# Altium PCB 10scm153adp1.PcbDoc
Units mil, origin at the board's own origin, x right, y up, seen from the top; angles counter-clockwise.
Board outline 6000 x 4000 mil, 2 copper layers (Top Layer, Bottom Layer); 36 components, 129 nets, 400 pads, 0 vias.
Unrouted connection lines stored in the file: 245.
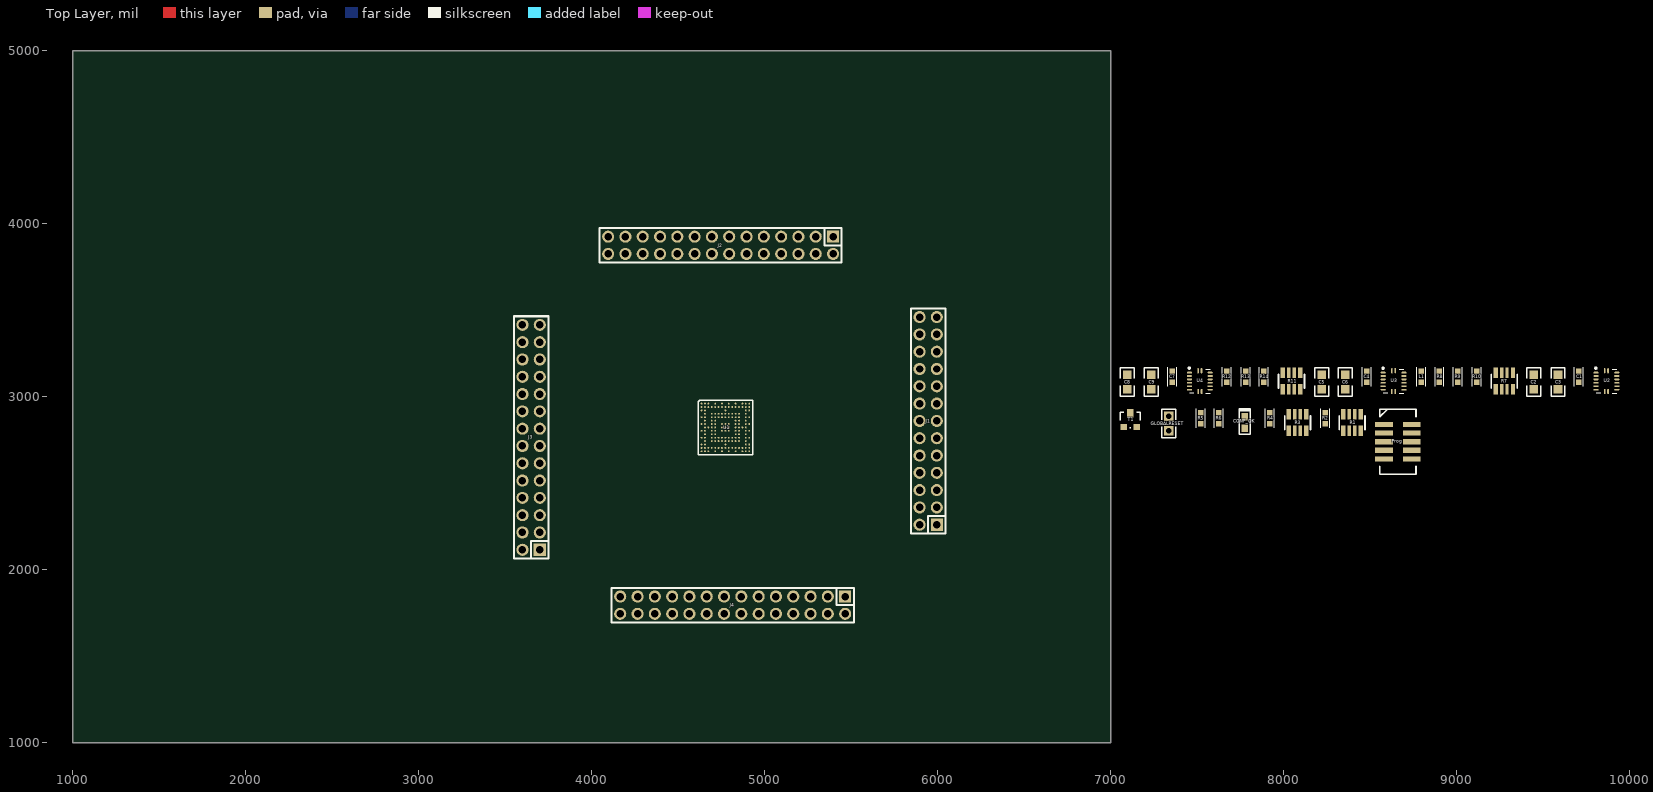
[diagram p0: Top Layer view]
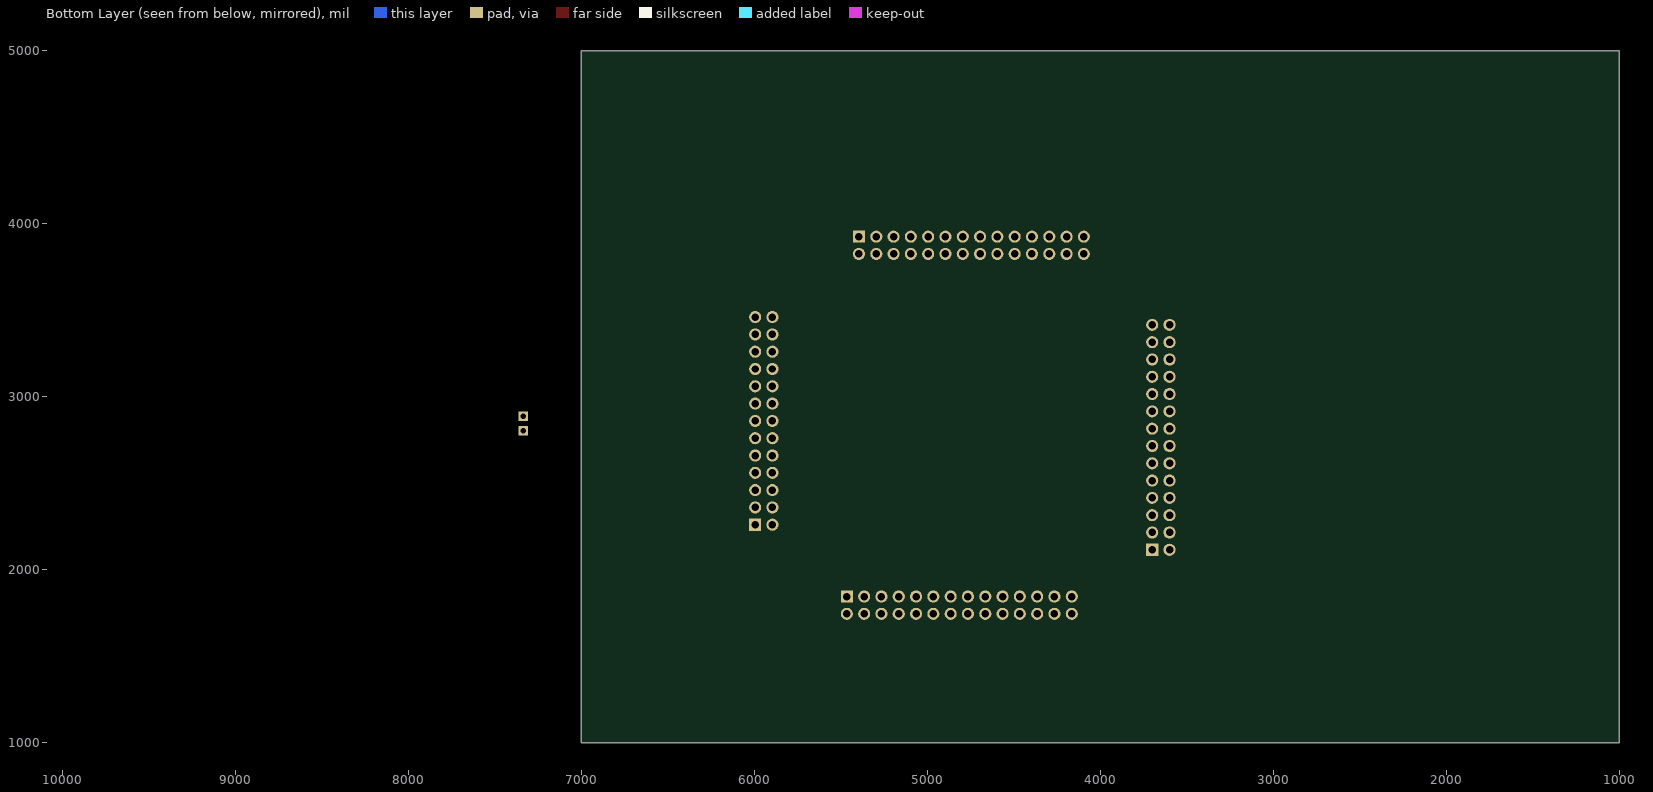
[diagram p1: Bottom Layer view, seen from below]

## Layer stack, top to bottom
Top Solder: solder mask 0.4, Solder Resist, Dk 3.5
Top Layer: signal copper 1.4
Dielectric 1: dielectric 12.6, FR-4, Dk 4.8
Bottom Layer: signal copper 1.4
Bottom Solder: solder mask 0.4, Solder Resist, Dk 3.5

## Board outline
1000,1000 7000,1000 7000,5000 1000,5000

## Design rules (kind name [scope] priority, off if disabled: settings)
Clearance BoardClearance [OnCopper vs IsKeepOut] p1: gap=19.68 ignorepadtopadclearanceinfootprint=FALSE except(0: Arc-Hole Track-Hole SMDPad-Hole THPad-Hole Via-Hole Fill-Hole Poly-Hole Region-Hole Text-Hole)
Clearance InPolyClearance [InPoly] p2: gap=11.81 ignorepadtopadclearanceinfootprint=FALSE except(0: Arc-Hole Track-Hole SMDPad-Hole THPad-Hole Via-Hole Fill-Hole Poly-Hole Region-Hole Text-Hole)
Clearance ClearanceMidLayer [OnMid] p3: gap=5 ignorepadtopadclearanceinfootprint=FALSE except(0: Arc-Hole Track-Hole SMDPad-Hole THPad-Hole Via-Hole Fill-Hole Poly-Hole Region-Hole Text-Hole)
Clearance ClearanceOuterLayer [OnBottomLayer or OnTopLayer] p4: gap=5 ignorepadtopadclearanceinfootprint=FALSE except(0: Arc-Hole Track-Hole SMDPad-Hole THPad-Hole Via-Hole Fill-Hole Poly-Hole Region-Hole Text-Hole)
ComponentClearance [All] p1 off: gap=10 collisioncheckmode=3 verticalgap=10 showdistances=FALSE
DiffPairsRouting [All] p1: maxlimit=10 minlimit=10 mostfreqgap=10 toplayer_minwidth=15 toplayer_maxwidth=15 toplayer_prefwidth=15 bottomlayer_minwidth=15 bottomlayer_maxwidth=15 bottomlayer_prefwidth=15 maxuncoupledlength=500
Height [All] p1: minheight=0 maxheight=1574.8 prefheight=500
HoleSize [All] p1: absolutevalues=TRUE maxlimit=236.22 minlimit=1 maxpercent=80.000 minpercent=20.000
MinimumAnnularRing MinimumAnnularRingOuterLayer [OnTopLayer or OnBottomLayer] p1: minimumring=6
MinimumAnnularRing MinimumAnnularRingOnMid [OnMid] p2: minimumring=5
MinimumSolderMaskSliver [not(IsComponentPrimitive and OnSolderMask)] p1 off: minsoldermaskwidth=3.94
MinimumSolderMaskSliver SilkscreenOverComponentPads [All] p2 off: minsoldermaskwidth=10
PolygonConnect PolygonConnectDirect [IsVia] p1: connectstyle=Direct reliefconductorwidth=10 reliefentries=4 polygonreliefangle="90 Angle" airgapwidth=10
PolygonConnect PolygonConnectElse [All] p2: connectstyle=Relief reliefconductorwidth=9.84 reliefentries=4 polygonreliefangle="90 Angle" airgapwidth=10
RoutingVias [All] p1: holewidth=23.62 width=43.31 viastyle="Through Hole" minholewidth=11.81 minwidth=19.68 maxholewidth=78.74 maxwidth=157.48
SilkToSilkClearance [All] p1 off: silktosilkclearance=3.94
SolderMaskExpansion [All] p1: expansion=4 istentingtop=FALSE
Width [All] p1: maxlimit=157.48 minlimit=4 preferedwidth=7.09 minimp=50.000000 maximp=50.000000 favimp=50.000000 checkconnectedcopper=TRUE
24 further rules are at their usual default settings.

## Classes and differential pairs
component class PWR: C1 C2 C3 C4 C5 C6 C7 C8 C9 L1 R7 R8 R9 R10 R11 R12 R13 R14 U2 U3 U4
component class IO: CONF_OK GLOBALRESET Prog R1 R2 R3 R4 R5 R6 T1 U1
component class 10scm153adp1_main: J1 J2 J3 J4
differential pair R13P14: +R13P14_P -R13P14_N
differential pair R9P9: +R9P9_P -R9P9_N
differential pair R5P4: +R5P4_P -R5P4_N
differential pair R3P3: +R3P3_P -R3P3_N
differential pair P15R14: +P15R14_P -P15R14_N
differential pair P8R7: +P8R7_P -P8R7_N
differential pair P7P6: +P7P6_P -P7P6_N
differential pair P2N1: +P2N1_P -P2N1_N
differential pair N15N14: +N15N14_P -N15N14_N
differential pair N8M8: +N8M8_P -N8M8_N
differential pair M12L11: +M12L11_P -M12L11_N
differential pair M11L10: +M11L10_P -M11L10_N
differential pair M9L9: +M9L9_P -M9L9_N
differential pair M7L8: +M7L8_P -M7L8_N
differential pair M5M4: +M5M4_P -M5M4_N
differential pair L7L6: +L7L6_P -L7L6_N
differential pair L4L5: +L4L5_P -L4L5_N
differential pair K14J14: +K14J14_P -K14J14_N
differential pair K11K12: +K11K12_P -K11K12_N
differential pair K4K5: +K4K5_P -K4K5_N
differential pair K2L1: +K2L1_P -K2L1_N
differential pair J15G15: +J15G15_P -J15G15_N
differential pair J12H11: +J12H11_P -J12H11_N
differential pair J9J11: +J9J11_P -J9J11_N
differential pair J5J4: +J5J4_P -J5J4_N
differential pair J2H3: +J2H3_P -J2H3_N
differential pair H12H13: +H12H13_P -H12H13_N
differential pair G11G12: +G11G12_P -G11G12_N
differential pair G5F5: +G5F5_P -G5F5_N
differential pair F11F12: +F11F12_P -F11F12_N
differential pair E11D12: +E11D12_P -E11D12_N
differential pair E9E10: +E9E10_P -E9E10_N
differential pair E2E1: +E2E1_P -E2E1_N
differential pair D11D10: +D11D10_P -D11D10_N
differential pair D7E7: +D7E7_P -D7E7_N
differential pair C15C14: +C15C14_P -C15C14_N
differential pair C2D2: +C2D2_P -C2D2_N
differential pair B15B14: +B15B14_P -B15B14_N
differential pair B13A14: +B13A14_P -B13A14_N
differential pair B12B11: +B12B11_P -B12B11_N
differential pair B7B6: +B7B6_P -B7B6_N
differential pair B1C1: +B1C1_P -B1C1_N
differential pair A9A11: +A9A11_P -A9A11_N
differential pair A7A5: +A7A5_P -A7A5_N
differential pair A2A3: +A2A3_P -A2A3_N

## Components (designator, comment, footprint, x,y, rotation, side; value= is the part's Value field where it differs from the comment)
C1 "4u7/10" 0603-IPC 9705,3115 r90 top
C2 "22u/25" 0805 9445,3085 r90 top
C3 "22u/25" 0805 9585,3085 r90 top
C4 "4u7/10" 0603-IPC 8480,3115 r90 top
C5 "22u/25" 0805 8220,3085 r90 top
C6 "22u/25" 0805 8355,3085 r90 top
C7 "4u7/10" 0603-IPC 7355,3115 r90 top
C8 "22u/25" 0805 7095,3085 r90 top
C9 "22u/25" 0805 7235,3085 r90 top
CONF_OK "LED0603-RW120" D0603 7775,2850 r90 top
GLOBALRESET "SHORT0805" SHORT0805 7335,2845 r90 top
J1 "ZL307-2X13" ZL307-2X13 5995,2260 r90 top
J2 "ZL307-2X14" ZL307-2X14 5395,3925 r180 top
J3 "ZL307-2X14" ZL307-2X14 3700,2115 r90 top
J4 "ZL307-2X14" ZL307-2X14 5465,1845 r180 top
L1 "BLM18AG102SN1D" 0603-IPC 8795,3115 r90 top
Prog "Minitek127_5D" MINITEK127_5D 8660,2740 r90 top
R1 "4x10k" 1206RP 8395,2850 r0 top
R2 "1k" 0603R 8240,2875 r90 top
R3 "4x10k" 1206RP 8080,2850 r0 top
R4 "4k7" 0603R 7920,2875 r90 top
R5 "4k7" 0603R 7520,2875 r90 top
R6 "330R" 0603R 7625,2875 r90 top
R7 "4x47k" 1206RP 9275,3090 r0 top
R8 "0R" 0603R 8900,3115 r90 top
R9 "0R" 0603R 9005,3115 r90 top
R10 "0R" 0603R 9115,3115 r90 top
R11 "4x47k" 1206RP 8045,3090 r0 top
R12 "0R" 0603R 7670,3115 r90 top
R13 "0R" 0603R 7780,3115 r90 top
R14 "0R" 0603R 7885,3115 r90 top
T1 "BC847" SOT23-3 7075,2825 r0 top
U1 "10M08SCM153I7G" MBGA153x15 4635,2960 r0 top
U2 "EP5388QI" EP5368QI 9865,3090 r0 top
U3 "EP5388QI" EP5368QI 8635,3090 r0 top
U4 "EP5388QI" EP5368QI 7515,3090 r0 top

## Footprints (in the part's own frame and the unit in brackets; to place one, negate y for a bottom-side part, rotate by r counter-clockwise, add the part's x,y. Pads: shape width x height; smd on the part's side, far side on the other; paste and mask are expansions set on the pad)
0603-IPC [mm]
  rect 0.8x0.8 smd: 1(-0.8,0) 2(0.8,0)
  silkscreen extent -1.4,-0.65 1.4,0.65, body extent -0.8,-0.4 0.8,0.4, height 1
0603R [mm]
  rect 0.8x0.8 smd: 1(-0.8,0) 2(0.8,0)
  silkscreen extent -1.4,-0.65 1.4,0.65, body extent -0.8,-0.4 0.8,0.4, height 0.45
0805 [mil]
  rect 50x50 smd: 1(-42.5,0) 2(42.5,0)
  silkscreen extent -84,-40 84,40, body extent -39,-28 39,28, height 51
1206RP [mil]
  rect 25.59x60 smd: 1(-50.2,-48) 4(50.2,-48) 5(50.2,48) 8(-50.2,48)
  rect 19.68x60 smd: 2(-15.75,-48) 3(15.75,-48) 6(15.75,48) 7(-15.75,48)
  silkscreen extent -75,-39 75,39, body extent -63,-31 63,31, height 22
D0603 [mm]
  rect 1.1x1 smd: ANOD(-0.85,0) CATH(0.85,0)
  silkscreen extent -1.7,-0.8 2.05,0.8, body extent -1.06,-0.7 0.94,0.7, height 1.35
EP5368QI [mm]
  oval 0.75x0.25 smd paste+0 mask+0.1: 1(-1.525,1.25) 2(-1.525,0.75) 3(-1.525,0.25) 4(-1.525,-0.25) 5(-1.525,-0.75) 6(-1.525,-1.25) 9(1.525,-1.25) 10(1.525,-0.75) 11(1.525,-0.25) 12(1.525,0.25) 13(1.525,0.75) 14(1.525,1.25)
  oval 0.25x0.75 smd mask+0.1: 7(-0.25,-1.525) 8(0.25,-1.525) 15(0.25,1.525) 16(-0.25,1.525)
  silkscreen extent -1.68,-1.75 1.5,2.03, body extent -1.51,-1.51 1.51,1.51, height 1.2
MBGA153x15 [mm]
  round 0.26 smd mask+0.015: A1(0,0) A2(0.5,0) A3(1,0) A5(2,0) A7(3,0) A9(4,0) A11(5,0) A13(6,0) A14(6.5,0) A15(7,0) B1(0,-0.5) B2(0.5,-0.5) B3(1,-0.5) B4(1.5,-0.5) B5(2,-0.5) B6(2.5,-0.5) B7(3,-0.5) B8(3.5,-0.5) B9(4,-0.5) B10(4.5,-0.5) B11(5,-0.5) B12(5.5,-0.5) B13(6,-0.5) B14(6.5,-0.5) B15(7,-0.5) C1(0,-1) C2(0.5,-1) C8(3.5,-1) C14(6.5,-1) C15(7,-1) D2(0.5,-1.5) D4(1.5,-1.5) D5(2,-1.5) D6(2.5,-1.5) D7(3,-1.5) D8(3.5,-1.5) D9(4,-1.5) D10(4.5,-1.5) D11(5,-1.5) D12(5.5,-1.5) D14(6.5,-1.5) E1(0,-2) E2(0.5,-2) E4(1.5,-2) E5(2,-2) E6(2.5,-2) E7(3,-2) E8(3.5,-2) E9(4,-2) E10(4.5,-2) E11(5,-2) E12(5.5,-2) E14(6.5,-2) E15(7,-2) F2(0.5,-2.5) F4(1.5,-2.5) F5(2,-2.5) F11(5,-2.5) F12(5.5,-2.5) F14(6.5,-2.5) G1(0,-3) G2(0.5,-3) G4(1.5,-3) G5(2,-3) G7(3,-3) G8(3.5,-3) G9(4,-3) G11(5,-3) G12(5.5,-3) G14(6.5,-3) G15(7,-3) H2(0.5,-3.5) H3(1,-3.5) H4(1.5,-3.5) H5(2,-3.5) H7(3,-3.5) H8(3.5,-3.5) H9(4,-3.5) H11(5,-3.5) H12(5.5,-3.5) H13(6,-3.5) H14(6.5,-3.5) J1(0,-4) J2(0.5,-4) J4(1.5,-4) J5(2,-4) J7(3,-4) J8(3.5,-4) J9(4,-4) J11(5,-4) J12(5.5,-4) J14(6.5,-4) J15(7,-4) K2(0.5,-4.5) K4(1.5,-4.5) K5(2,-4.5) K11(5,-4.5) K12(5.5,-4.5) K14(6.5,-4.5) L1(0,-5) L2(0.5,-5) L4(1.5,-5) L5(2,-5) L6(2.5,-5) L7(3,-5) L8(3.5,-5) L9(4,-5) L10(4.5,-5) L11(5,-5) L12(5.5,-5) L14(6.5,-5) L15(7,-5) M2(0.5,-5.5) M4(1.5,-5.5) M5(2,-5.5) M6(2.5,-5.5) M7(3,-5.5) M8(3.5,-5.5) M9(4,-5.5) M10(4.5,-5.5) M11(5,-5.5) M12(5.5,-5.5) M14(6.5,-5.5) N1(0,-6) N2(0.5,-6) N8(3.5,-6) N14(6.5,-6) N15(7,-6) P1(0,-6.5) P2(0.5,-6.5) P3(1,-6.5) P4(1.5,-6.5) P5(2,-6.5) P6(2.5,-6.5) P7(3,-6.5) P8(3.5,-6.5) P9(4,-6.5) P10(4.5,-6.5) P11(5,-6.5) P12(5.5,-6.5) P13(6,-6.5) P14(6.5,-6.5) P15(7,-6.5) R1(0,-7) R2(0.5,-7) R3(1,-7) R5(2,-7) R7(3,-7) R9(4,-7) R11(5,-7) R13(6,-7) R14(6.5,-7) R15(7,-7)
  silkscreen extent -0.5,-7.5 7.5,0.5, body extent -0.5,-7.5 7.5,0.5, height 1
MINITEK127_5D [mm]
  rect 0.76x2.6 smd paste+0 mask+0.05: 1(2.54,2.05) 2(2.54,-2.05) 3(1.27,2.05) 4(1.27,-2.05) 5(0,2.05) 6(0,-2.05) 7(-1.27,2.05) 8(-1.27,-2.05) 9(-2.54,2.05) 10(-2.54,-2.05)
  silkscreen extent -4.76,-2.65 4.76,2.65, body extent -4.76,-2.75 4.76,2.75, height 5.6
SHORT0805 [mm]
  rect 1.4x1.4 hole 0.8: 1(-1.079,0) 2(1.079,0)
  silkscreen extent -2.12,-1.02 2.12,1.02, body extent -1.5,-0.4 1.5,0.4, height 0.9
SOT23-3 [mil]
  rect 36x36 smd: 1(0,0) 2(75,0)
  rect 36x50 smd: 3(38,80)
  silkscreen extent -20,-5 95,85, body extent -22,-7 97,87, height 43
ZL307-2X13 [mil]
  rect 70x70 hole 43.31: 1(0,0)
  round 70 hole 43.31: 2(0,100) 3(100,0) 4(100,100) 5(200,0) 6(200,100) 7(300,0) 8(300,100) 9(400,0) 10(400,100) 11(500,0) 12(500,100) 13(600,0) 14(600,100) 15(700,0) 16(700,100) 17(800,0) 18(800,100) 19(900,0) 20(900,100) 21(1000,0) 22(1000,100) 23(1100,0) 24(1100,100) 25(1200,0) 26(1200,100)
  silkscreen extent -50,-50 1250,150, body extent -50,-50 1250,150, height 276
ZL307-2X14 [mil]
  rect 70x70 hole 43.31: 1(0,0)
  round 70 hole 43.31: 2(0,100) 3(100,0) 4(100,100) 5(200,0) 6(200,100) 7(300,0) 8(300,100) 9(400,0) 10(400,100) 11(500,0) 12(500,100) 13(600,0) 14(600,100) 15(700,0) 16(700,100) 17(800,0) 18(800,100) 19(900,0) 20(900,100) 21(1000,0) 22(1000,100) 23(1100,0) 24(1100,100) 25(1200,0) 26(1200,100) 27(1300,0) 28(1300,100)
  silkscreen extent -50,-50 1350,150, body extent -50,-50 1350,150, height 276

## Part data
C1 C4 C7: library part CAP131, Manufacturer5=Samsung, DateOfPrice5=01-01-2010, Descript="Kondensator: ceramiczny; MLCC; 4,7uF; 10V; X5R; ±10%; SMD; 0603", ID=131, Kod=CAP131, Price5=0, Reference5=CL10A475KP8NNNC, Supplier5=tme.pl, Typ5=CL10A475KP8NNNC
C2 C3 C5 C6 C8 C9: library part CAP96, Manufacturer5=Samsung, DateOfPrice5=29-12-2020, Descript="Kondensator: ceramiczny; MLCC; 22uF; 25V; X5R; ±20%; SMD; 0805", ID=96, Kod=CAP96, Price5=1,5, Reference5=CL21A226MAQNNNE, Supplier5=tme.pl, Typ5=CL21A226MAQNNNE
CONF_OK: library part Opt25, Manufacturer5=Honglitronic, DateOfPrice5=10-05-2020, Descript="Dioda LED, SMD 0603, Czerwona 626-636nm, 50-70 mCd /10mA, water clear, 120°", ID=25, Kod=Opt25, Price5=0,12, Reference5=LED0603-RW120, Supplier5=maritex.com.pl, Typ5=LED0603-RW120
GLOBALRESET: library part Res238, Manufacturer5=-, Descript="Przewlekana zwora z drutu na planie rezystora 0805", ID=238, Kod=Res238, Price5=0,1, Reference5=-, Supplier5=-, Typ5=-
J1: library part CON85, Manufacturer5=Connfly, DateOfPrice5=05-01-2021, Descript="Gniazdo; kołkowe; żeńskie; PIN: 80; toczone styki; proste; 2,54mm, wycięte 2x13 pinów", ID=85, Kod=CON85, Price5=12, Reference5=ZL307-2X40, Replacement=bd, Supplier5=tme, Typ5=DS1002-03-2*40131
J2 J3 J4: library part CON84, Manufacturer5=Connfly, DateOfPrice5=05-01-2021, Descript="Gniazdo; kołkowe; żeńskie; PIN: 80; toczone styki; proste; 2,54mm, wycięte 2x14 pinów", ID=84, Kod=CON84, Price5=20, Reference5=ZL307-2X40, Replacement=bd, Supplier5=tme, Typ5=DS1002-03-2*40131
L1: library part Ind41, InductCurr=-, Manufacturer5=Murata, DateOfPrice5=10-05-2020, Descript="Ferryt: koralik; Imp.@ 100MHz:1000om; Montaż: SMD; 0,4A; Obud:0603", ID=41, Kod=Ind41, Price5=0, Reference5=BLM18AG102SN1D, Supplier5=tme.pl, Typ5=BLM18AG102SN1D
Prog: library part CON83, Manufacturer5=Amphenol, DateOfPrice5=29-12-2020, Descript="Gniazdo; IDC; Minitek127; męskie; PIN: 10; pionowe; 1,27mm; SMT; 2x5", ID=83, Kod=CON83, Price5=3,5, Reference5=20021221-00010C4LF, Replacement=bd, Supplier5=tme, Typ5=20021221-00010C4LF
R1 R3: library part Res287, Manufacturer5="Royal Ohm", DateOfPrice5=29-12-2020, Descript="Drabinka rezystorowa: Y; 10kΩ; SMD; 1206; Il.rezystorów: 4; 63mW", ID=287, Kod=Res287, Price5=0,1, Reference5=DR1206-10K-4/8, Supplier5=tme, Typ5=4D03WGJ0103T5E
R2: library part Res52, Manufacturer5="Royal Ohm", DateOfPrice5=10-05-2020, Descript="Rezystor: thick film; SMD; 0603; 1kom; 0,1W; ±1%; -55÷155°C", ID=52, Kod=Res52, Price5=0,08, Reference5=SMD0603-1K-1%, Supplier5=tme.pl, Typ5=0603SAF1001T5E
R4 R5: library part Res171, Manufacturer5="Royal Ohm", DateOfPrice5=25-06-2020, Descript="Rezystor: thick film; SMD; 0603; 4,7kom; 0,1W; ±1%; -55÷125°C", ID=171, Kod=Res171, Price5=0,1, Reference5=SMD0603-4K7-1%, Supplier5=tme.pl, Typ5=0603SAF4701T5E
R6: library part Res127, Manufacturer5="Royal Ohm", DateOfPrice5=25-06-2020, Descript="Rezystor: thick film; SMD; 0603; 330Ω; 0,1W; ±1%; -55÷125°C", ID=127, Kod=Res127, Price5=0,1, Reference5=SMD0603-330R-1%, Supplier5=tme.pl, Typ5=0603SAF3300T5E
R7 R11: library part Res182, Manufacturer5="Royal Ohm", DateOfPrice5=10-05-2020, Descript="Drabinka rezystorowa: Y; 47kΩ; SMD; 1206; Il.rezystorów:4; 63mW", ID=182, Kod=Res182, Price5=0,1, Reference5=DR1206-47K-4/8, Supplier5=tme.pl, Typ5=4D03WGJ0473T
R8 R9 R10 R12 R13 R14: library part Res1, Manufacturer5=Yageo, DateOfPrice5=25-06-2020, Descript="Rezystor: thick film; SMD; 0603; 0ohm; 0,1W; ±5%; -55÷155°C", ID=1, Kod=Res1, Price5=0,1, Reference5=RC0603JR-070R, Supplier5=tme.pl, Typ5=RC0603JR-070RL
T1: library part Tra11, Manufacturer5=NXP, DateOfPrice5=01-01-2010, Descript="SMD transistor 50V 0.1A", ID=11, Kod=Tra11, Price5=0, Reference5=BC847A.215, Supplier5=tme.pl, Typ5=BC847A.215
U1: library part ICs341, Manufacturer5=Intel, DateOfPrice5=29-12-2020, Descript="FPGA - Field Programmable Gate Array non-volatile FPGA, 112 I/O, 153MBGA", ID=341, Kod=ICs341, Price5=100, Reference5=989-10M08SCM153I7G, Supplier5=Mouser, Typ5=10M08SCM153I7G
U2 U3 U4: library part ICs340, Manufacturer5=Intel, DateOfPrice5=29-12-2020, Descript="Switching Voltage Regulators 800mA BUCK REGULATOR INTEGRATED INDUCTOR", ID=340, Kod=ICs340, Price5=15, Reference5=884-EP5388QI, Supplier5=Mouser, Typ5=EP5388QI

## Nets (pads, with @x,y where several pads share a name; then routed paths per layer and width w, separated by ;. In a path a pad name is that pad's centre, name@x,y a point inside that pad or via, vN(x,y) a via of type N, cw(c..) or ccw(c..) an arc to the next point about the centre after c; other vN are vias at no path point)
+5V: C1.1 C4.1 C7.1 J1.25 R7.1 R7.2 R7.3 R7.4 R11.1 R11.2 R11.3 R11.4 U2.13 U2.14 U3.13 U3.14 U4.13 U4.14
/CONFIG: R3.3 R3.4 U1.E8
/DEV_CLR: GLOBALRESET.1 R5.1 U1.B8
/STATUS: R1.2 U1.D6
A2A3_N: J1.3 U1.A3
A2A3_P: J1.1 U1.A2
A7A5_N: J1.7 U1.A5
A7A5_P: J1.5 U1.A7
A9A11_N: J1.4 U1.A11
A9A11_P: J1.2 U1.A9
A13: J2.26 U1.A13
B1C1_N: J3.8 U1.C1
B1C1_P: J3.6 U1.B1
B4: J2.27 U1.B4
B7B6_N: J1.8 U1.B6
B7B6_P: J1.6 U1.B7
B12B11_N: J1.11 U1.B11
B12B11_P: J1.9 U1.B12
B13A14_N: J1.12 U1.A14
B13A14_P: J1.10 U1.B13
B15B14_N: J1.15 U1.B14
B15B14_P: J1.13 U1.B15
C2D2_N: J3.7 U1.D2
C2D2_P: J3.5 U1.C2
C8: J2.25 U1.C8
C15C14_N: J4.15 U1.C14
C15C14_P: J4.13 U1.C15
CONF_DONE: R3.2 R4.1 U1.E6
CONFIG_SEL: R1.1 U1.D8
D7E7_N: J2.12 U1.E7
D7E7_P: J2.10 U1.D7
D11D10_N: J2.4 U1.D10
D11D10_P: J2.2 U1.D11
E2E1_N: J2.24 U1.E1
E2E1_P: J2.22 U1.E2
E9E10_N: J4.24 U1.E10
E9E10_P: J4.22 U1.E9
E11D12_N: J4.19 U1.D12
E11D12_P: J4.17 U1.E11
E14: J4.11 U1.E14
E15: J4.10 U1.E15
F11F12_N: J4.20 U1.F12
F11F12_P: J4.18 U1.F11
G2: J3.14 U1.G2
G5F5_N: J3.27 U1.F5
G5F5_P: J3.25 U1.G5
G11G12_N: J2.11 U1.G12
G11G12_P: J2.9 U1.G11
GND: C1.2 C2.2 C3.2 C4.2 C5.2 C6.2 C7.2 C8.2 C9.2 GLOBALRESET.2 J1.26 Prog.2 Prog.10 R2.1 R8.2 R9.2 R10.2 R12.2 R13.2 R14.2 T1.2 U1.A1 U1.A15 U1.B2 U1.D4 U1.D5 U1.D9 U1.E4 U1.E5 U1.E12 U1.G4 U1.G9 U1.H8 U1.H14 U1.J7 U1.L12 U1.M2 U1.M6 U1.M10 U1.R1 U1.R15 U2.2 U2.3 U2.6 U3.2 U3.3 U3.6 U4.2 U4.3 U4.6 U4.10 U4.11 U4.12
H12H13_N: J2.8 U1.H13
H12H13_P: J2.6 U1.H12
J2H3_N: J3.4 U1.H3
J2H3_P: J3.2 U1.J2
J5J4_N: J2.7 U1.J4
J5J4_P: J2.5 U1.J5
J9J11_N: J2.23 U1.J11
J9J11_P: J2.21 U1.J9
J12H11_N: J2.3 U1.H11
J12H11_P: J2.1 U1.J12
J15G15_N: J4.16 U1.G15
J15G15_P: J4.14 U1.J15
JTAGEN: R1.4 U1.G7
K2L1_N: J3.3 U1.L1
K2L1_P: J3.1 U1.K2
K4K5_N: J2.15 U1.K5
K4K5_P: J2.13 U1.K4
K11K12_N: J2.20 U1.K12
K11K12_P: J2.18 U1.K11
K14J14_N: J4.4 U1.J14
K14J14_P: J4.2 U1.K14
L4L5_N: J2.16 U1.L5
L4L5_P: J2.14 U1.L4
L7L6_N: J3.23 U1.L6
L7L6_P: J3.21 U1.L7
L15: J4.21 U1.L15
M5M4_N: J3.11 U1.M4
M5M4_P: J3.9 U1.M5
M7L8_N: J1.19 U1.L8
M7L8_P: J1.17 U1.M7
M9L9_N: J4.8 U1.L9
M9L9_P: J4.6 U1.M9
M11L10_N: J3.19 U1.L10
M11L10_P: J3.17 U1.M11
M12L11_N: J1.23 U1.L11
M12L11_P: J1.21 U1.M12
M14: J4.12 U1.M14
N8M8_N: J4.3 U1.M8
N8M8_P: J4.1 U1.N8
N15N14_N: J1.24 U1.N14
N15N14_P: J1.22 U1.N15
NetCONF_OK_CATH: CONF_OK.CATH R6.2
NetL1_1: L1.1 U1.B3 U1.D14 U1.F4 U1.N2 U1.P13
NetR4_2: R4.2 T1.1
NetR6_1: R6.1 T1.3
NetR7_6: R7.6 R10.1 U2.10
NetR7_7: R7.7 R9.1 U2.11
NetR7_8: R7.8 R8.1 U2.12
NetR11_6: R11.6 R14.1 U3.10
NetR11_7: R11.7 R13.1 U3.11
NetR11_8: R11.8 R12.1 U3.12
NetU1_B5: U1.B5 U1.B9 U1.B10
NetU1_F14: U1.F14 U1.G14 U1.L14
P1: J3.13 U1.P1
P2N1_N: J2.19 U1.N1
P2N1_P: J2.17 U1.P2
P7P6_N: J3.24 U1.P6
P7P6_P: J3.22 U1.P7
P8R7_N: J1.16 U1.R7
P8R7_P: J1.14 U1.P8
P12: J3.15 U1.P12
P15R14_N: J1.20 U1.R14
P15R14_P: J1.18 U1.P15
R2: J3.16 U1.R2
R3P3_N: J3.12 U1.P3
R3P3_P: J3.10 U1.R3
R5P4_N: J3.20 U1.P4
R5P4_P: J3.18 U1.R5
R9P9_N: J3.28 U1.P9
R9P9_P: J3.26 U1.R9
R11: J4.9 U1.R11
R13P14_N: J4.7 U1.P14
R13P14_P: J4.5 U1.R13
TCK: Prog.1 R2.2 U1.J1
TDI: Prog.9 R3.1 U1.H5
TDO: Prog.3 U1.H4
TMS: Prog.5 R1.3 U1.G1
VCCHS: C2.1 C3.1 U1.P5 U1.P10 U1.P11 U2.5 U2.7 U2.8
VCCLS: C5.1 C6.1 CONF_OK.ANOD Prog.4 R1.5 R1.6 R1.7 R1.8 R3.5 R3.6 R3.7 R3.8 R5.2 U1.F2 U1.H2 U1.L2 U3.5 U3.7 U3.8
VCCONE: C8.1 C9.1 L1.2 U1.G8 U1.H7 U1.H9 U1.J8 U4.5 U4.7 U4.8
pads on no net: J2.28 J4.23 J4.25 J4.26 J4.27 J4.28 Prog.6 Prog.7 Prog.8 R7.5 R11.5 U2.1 U2.4 U2.9 U2.15 U2.16 U3.1 U3.4 U3.9 U3.15 U3.16 U4.1 U4.4 U4.9 U4.15 U4.16